# EAGLE board PCB_v33 (EAGLE 9.7.0)
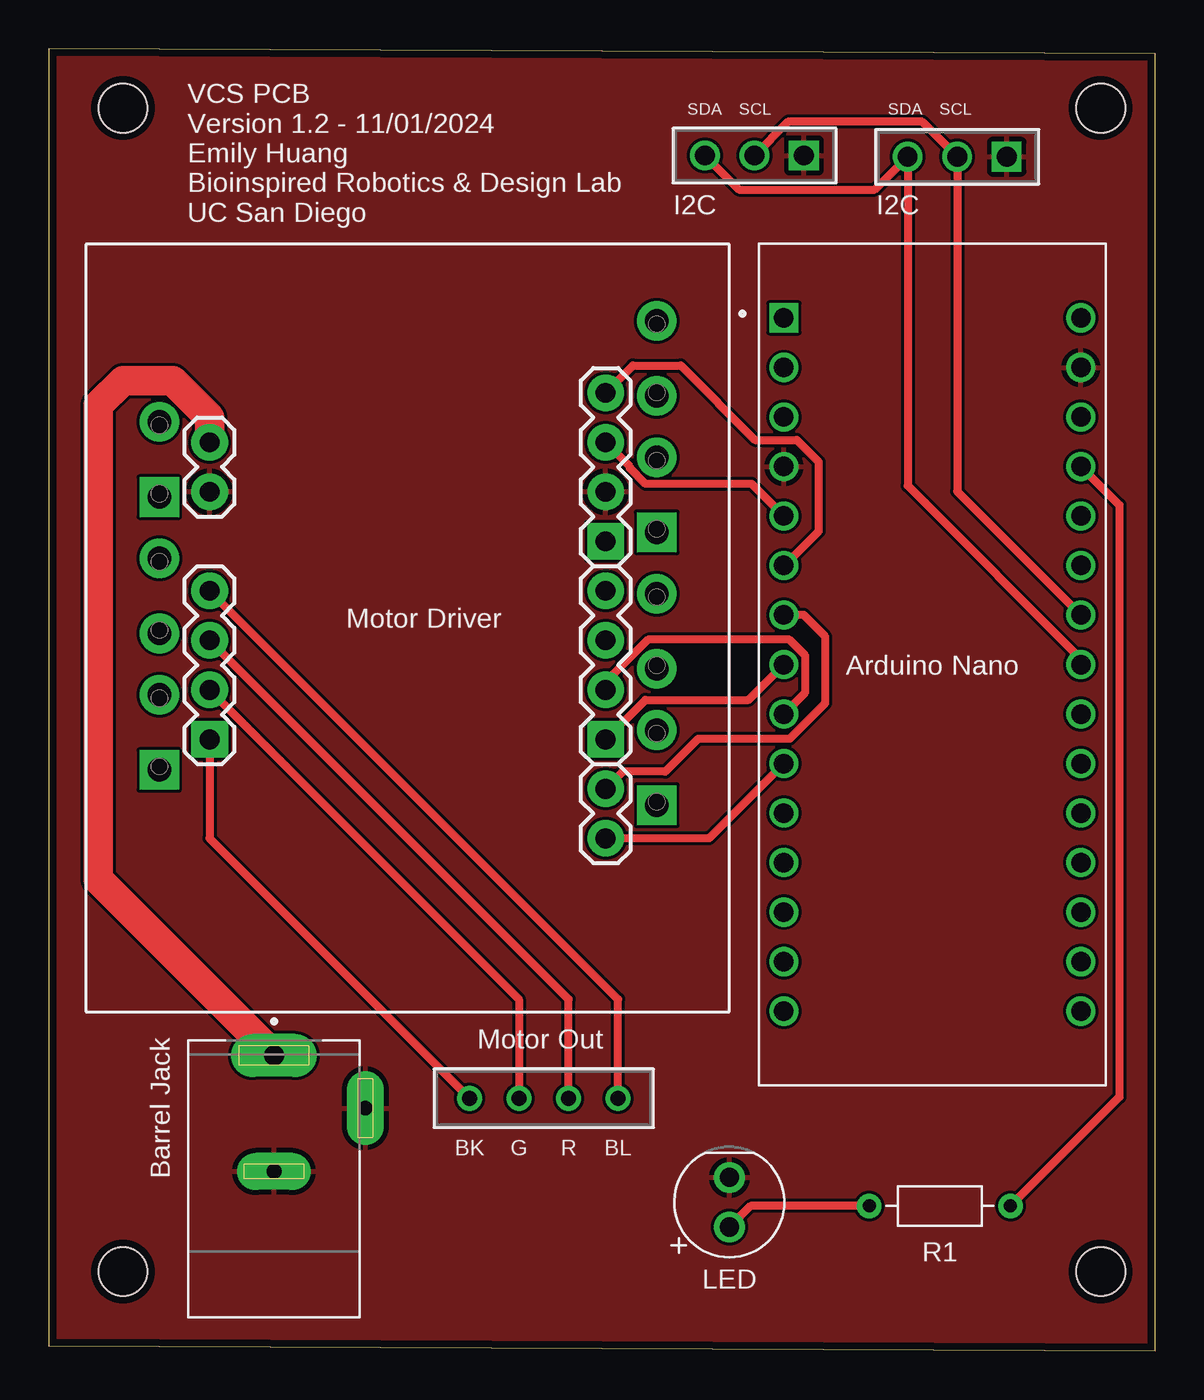
[diagram p0: board, top side]

Size 56.77 x 66.8 mm. Coordinates in mm from the lower left corner, seen from the top.
Outline: 0,0.25 56.77,0 56.77,66.55 0,66.8 0,0.25
Copper layers (1*16): Top 0.035559375mm / dielectric 1.6mm / Bottom 0.035559375mm
Design rules "oshpark-2layer": minimum track width 6mil, minimum drill 10mil, track to track 6mil, track to pad 6mil, pad to pad 6mil, via to via 6mil, smd to smd 6mil, copper to edge 15mil, drill to drill 6mil, minimum pad ring 5mil, minimum via ring 5mil, stop-mask expansion 2.5mil, vias tented up to drill 0mil, thermal gap 10mil
Holes 2.5 mm at 3.81,63.75 53.98,63.75 3.81,4.06 53.98,4.06

## Footprints (pad centres in the part's own frame; a part is rotated, then mirrored left to right if it is on the bottom)
MPD_EJ508A = drill 1.02 pad 2.2 long: 1 0,2.705 | drill 0.76 pad 1.9 long: 2 0,-3.25; 3 4.69,0
CONN_PPPC031LFBN-RC_SUL = drill 1.016 pad 1.524 square: 1 0,0 | drill 1.016 pad 1.524: 2 -2.54,0; 3 -5.08,0
1X02 = drill 1.016 pad 1.88: 1 0,0; 2 2.54,0
1X04 = drill 1.016 pad 1.88 square: 1 0,0 | drill 1.016 pad 1.88: 2 2.54,0; 3 5.08,0; 4 7.62,0
SCREWTERMINAL-3.5MM-4_LOCK = drill 1.2 pad 2.032 square: 1 -0.178,0 | drill 1.2 pad 2.032: 2 3.678,0; 3 6.822,0; 4 10.678,0
SCREWTERMINAL-3.5MM-2_LOCK = drill 1.2 pad 2.032 square: 1 -0.178,0 | drill 1.2 pad 2.032: 2 3.678,0
LEDRD254W60D565H860B_Y = drill 0.981 pad 1.581: A -1.27,0; C 1.27,0
CONN_PPTC041LFBN-RC_SUL = drill 0.762 pad 1.27: 1 0,0; 2 -2.54,0; 3 -5.08,0; 4 -7.62,0
MODULE_A000005 = drill 1 square: 1 -7.62,17.78 | drill 1: 2 -7.62,15.24; 3 -7.62,12.7; 4 -7.62,10.16; 5 -7.62,7.62; 6 -7.62,5.08; 7 -7.62,2.54; 8 -7.62,0; 9 -7.62,-2.54; 10 -7.62,-5.08; 11 -7.62,-7.62; 12 -7.62,-10.16; 13 -7.62,-12.7; 14 -7.62,-15.24; 15 -7.62,-17.78; 16 7.62,-17.78; 17 7.62,-15.24; 18 7.62,-12.7; 19 7.62,-10.16; 20 7.62,-7.62; 21 7.62,-5.08; 22 7.62,-2.54; 23 7.62,0; 24 7.62,2.54; 25 7.62,5.08; 26 7.62,7.62; 27 7.62,10.16; 28 7.62,12.7; 29 7.62,15.24; 30 7.62,17.78
RESAD724W46L381D178B = drill 0.66 pad 1.26: 1 -3.62,0; 2 3.62,0

## Placement (x,y rotation side)
BJ  EJ508A  [MPD_EJ508A]  11.56,12.45 0 top
I^2C  PPPC031LFBN-RCCONN_PPPC031LFBN-RC_SUL  [CONN_PPPC031LFBN-RC_SUL]  49.15,61.26 0 top
I^2C1  PPPC031LFBN-RCCONN_PPPC031LFBN-RC_SUL  [CONN_PPPC031LFBN-RC_SUL]  38.75,61.32 0 top
JP1  [1X02]  8.26,44.07 90 top
JP3  [1X04]  8.26,31.37 90 top
JP5  [SCREWTERMINAL-3.5MM-4_LOCK]  5.67,29.98 90 top
JP6  [1X02]  28.57,26.29 90 top
JP7  [SCREWTERMINAL-3.5MM-2_LOCK]  5.67,43.98 90 top
JP10  [1X04]  28.57,31.37 90 top
JP11  [SCREWTERMINAL-3.5MM-4_LOCK]  31.2,28.17 90 top
JP12  [SCREWTERMINAL-3.5MM-4_LOCK]  31.2,42.17 90 top
JP14  [1X04]  28.57,41.53 90 top
LED  LED_RADIALYELLOW  [LEDRD254W60D565H860B_Y]  34.92,7.62 90 top
MW  PPTC041LFBN-RCCONN_PPTC041LFBN-RC_SUL  [CONN_PPTC041LFBN-RC_SUL]  29.21,12.95 0 top
NANO  A000005  [MODULE_A000005]  45.34,35.21 0 top
R1  [RESAD724W46L381D178B]  45.72,7.43 180 top

## Library data of the parts
BJ = New Barrel Jack; MANUFACTURER: MPD; MAXIMUM_PACKAGE_HEIGHT: 10.85 mm; PARTREV: J; STANDARD: Manufacturer Recommendations
I^2C I^2C1 = I2C; COPYRIGHT: Copyright (C) 2024 Ultra Librarian. All rights reserved.; MANUFACTURER_PART_NUMBER: PPPC031LFBN-RC; MFR_NAME: Sullins
JP1 JP3 JP6 JP10 JP14 = SparkFun
JP5 JP7 JP11 JP12 = BigEasyDriver_v11
LED = Opto-Electronic
MW = 4pin; COPYRIGHT: Copyright (C) 2024 Ultra Librarian. All rights reserved.; MANUFACTURER_PART_NUMBER: PPTC041LFBN-RC; MFR_NAME: Sullins
NANO = ArduinoNano; MANUFACTURER: Arduino; MAXIMUM_PACKAGE_HEIGHT: N/A; PARTREV: 23/03/2020; STANDARD: Manufacturer Recommendations
R1 = Resistor; CATEGORY: Resistor; SUB-CATEGORY: Fixed

## Nets
3V3: NANO.17
A+: JP3.1 MW.4
A-: JP3.2 MW.3
B+: JP3.3 MW.2
B-: JP3.4 MW.1
DIR: JP14.4 NANO.6
ENABLE: JP6.1 NANO.10
GND: BJ.2 BJ.3 I^2C1.1 I^2C.1 JP1.1 JP14.2 LED.C NANO.4 NANO.29
M+: BJ.1 JP1.2
N$9: JP6.2 NANO.7
N$10: JP10.1 NANO.8
N$11: JP10.2 NANO.9
N$14: LED.A R1.2
N$17: I^2C1.3 I^2C.3 NANO.23
N$18: I^2C1.2 I^2C.2 NANO.24
N$19: NANO.27 R1.1
STEP: JP14.3 NANO.5
VIN: NANO.30

## Tracks (layer width: path | path; a pad name or v marks a point on that pad's centre or on a via)
A+
  Top 0.406: JP3.1 8.26,26.29 MW.4
A-
  Top 0.406: JP3.2 24.13,18.03 MW.3
B+
  Top 0.406: JP3.3 26.67,18.03 MW.2
B-
  Top 0.406: MW.1 29.21,18.03 JP3.4
DIR
  Top 0.406: JP14.4 29.97,50.55 32.43,50.55 36.24,46.73 38.38,46.73 39.5,45.61 39.5,42.04 37.75,40.29 NANO.6
ENABLE
  Top 0.406: NANO.10 33.88,26.29 JP6.1
GND
  pour Top: 0.08,0.33 56.69,0.33 56.69,66.73 0.08,66.73
M+
  Top 1.524: JP1.2 8.26,47.88 6.35,49.78 3.81,49.78 2.54,48.51 2.54,24.17 BJ.1
N$9
  Top 0.406: NANO.7 38.73,37.75 39.84,36.64 39.84,33.23 38.01,31.4 33.32,31.4 31.64,29.72 29.46,29.72 JP6.2
N$10
  Top 0.406: JP10.1 30.61,33.4 35.91,33.4 NANO.8
N$11
  Top 0.406: NANO.9 38.83,33.77 38.83,35.67 38,36.49 30.75,36.49 28.57,34.31 JP10.2
N$14
  Top 0.406: R1.2 36.01,7.43 LED.A
N$17
  Top 0.406: NANO.23 53.24,35.21 44.07,44.38 I^2C.3 42.38,59.57 35.42,59.57 I^2C1.3
N$18
  Top 0.406: NANO.24 46.61,44.09 I^2C.2 44.8,63.08 37.96,63.08 I^2C1.2
N$19
  Top 0.406: R1.1 54.93,13.02 54.93,43.39 NANO.27
STEP
  Top 0.406: JP14.3 29.82,45.36 29.82,45.28 30.63,44.47 36.07,44.47 NANO.5

## Text on the board
tPlace: SDA | SCL | SDA | SCL | I2C | I2C | VCS PCB / Version 1.2 - 11/01/2024 / Emily Huang / Bioinspired Robotics & Design Lab / UC San Diego | Motor Driver | Arduino Nano | Motor Out | Barrel Jack | BK | G | R | BL | R1 | LED